# Altium PCB DAC_PCB_backup.PcbDoc
Units mil, origin at the board's own origin, x right, y up, seen from the top; angles counter-clockwise.
Board outline 1700 x 1900 mil, 4 copper layers (Top Layer, VDD, GND, Bottom Layer), stack 23.756 mil thick; 26 components, 30 nets, 86 pads, 19 vias.
Unrouted connection lines stored in the file: 21.
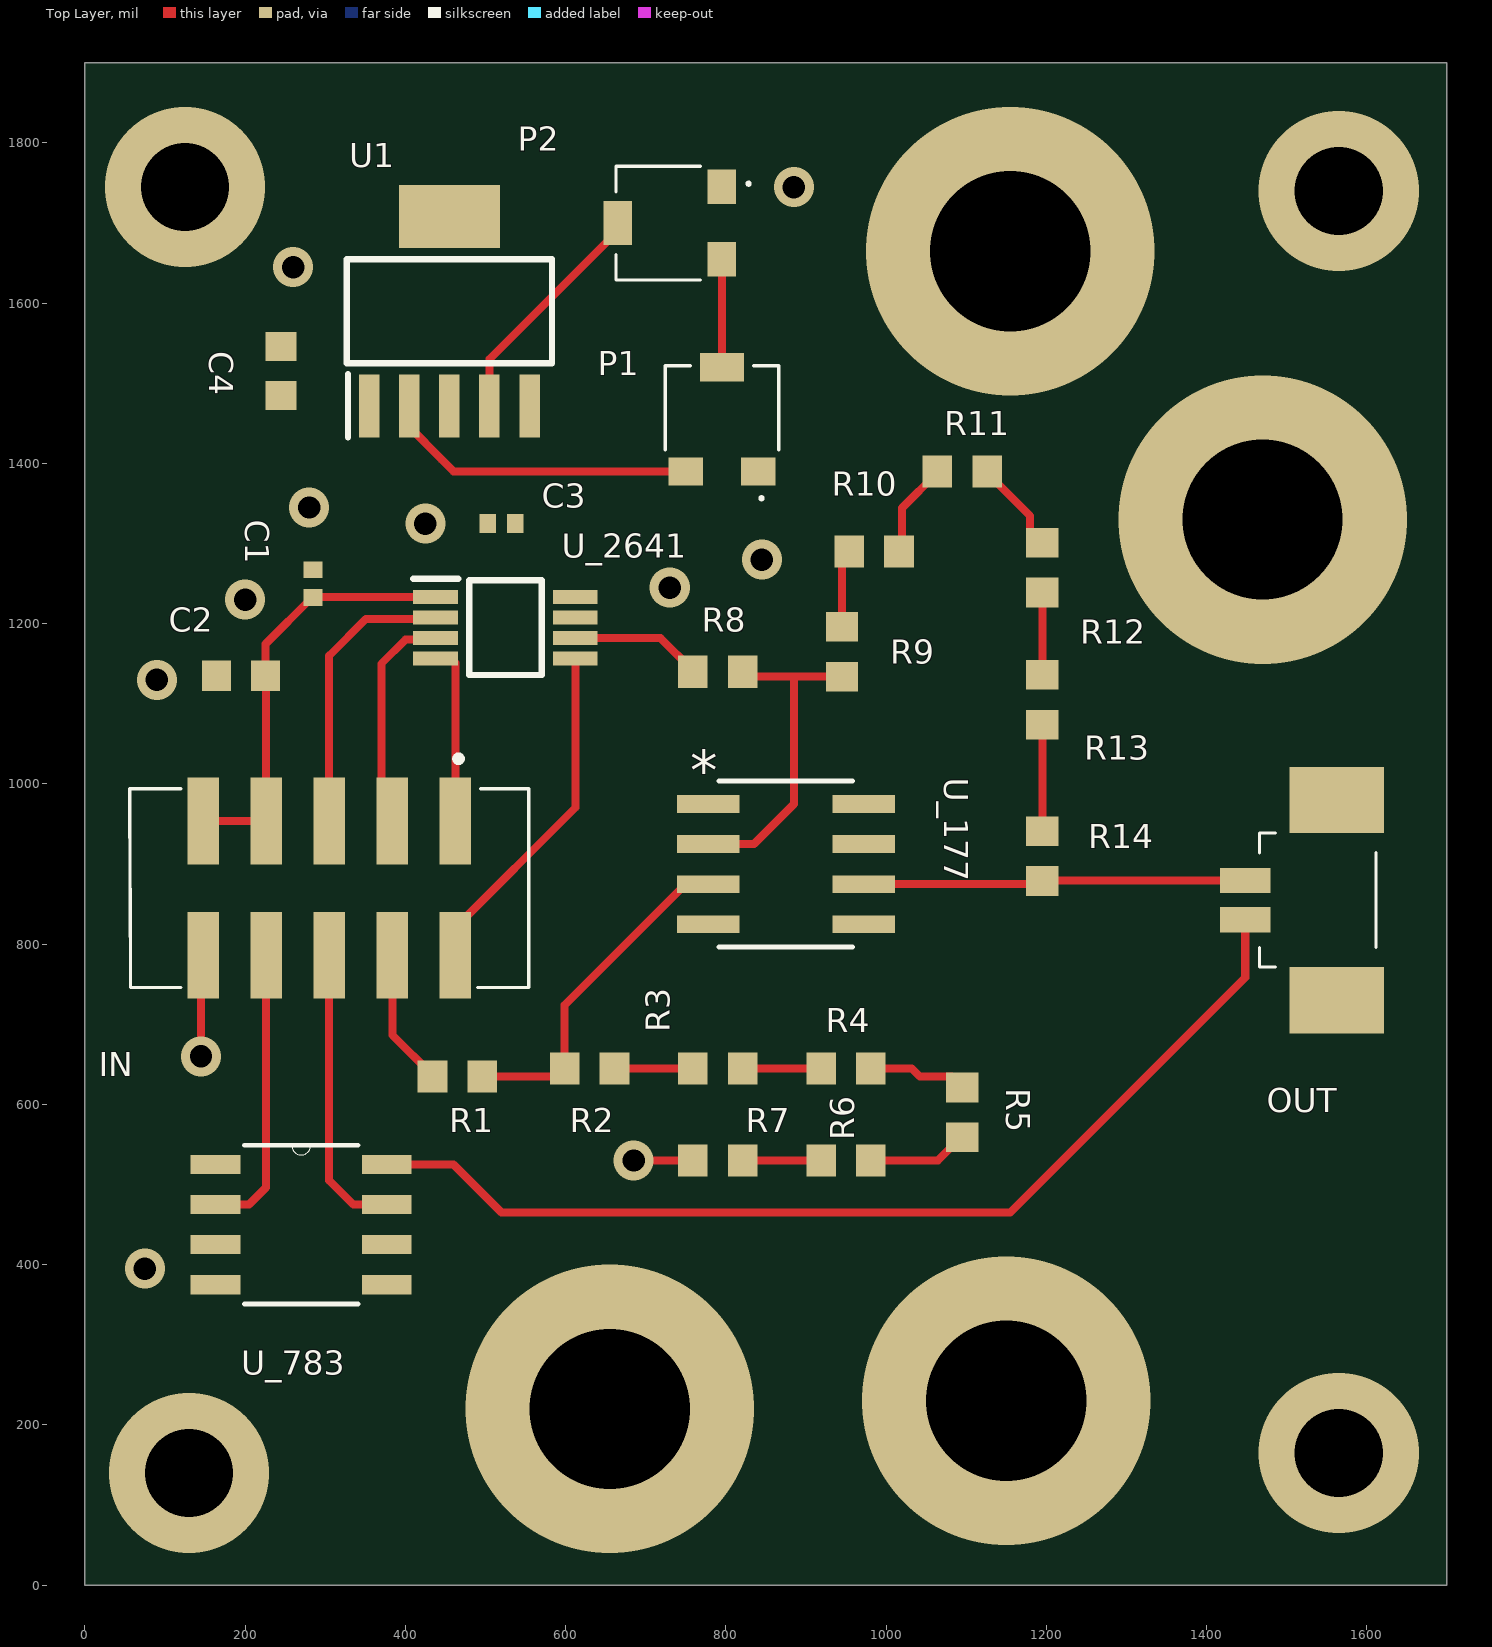
[diagram p0: Top Layer view]
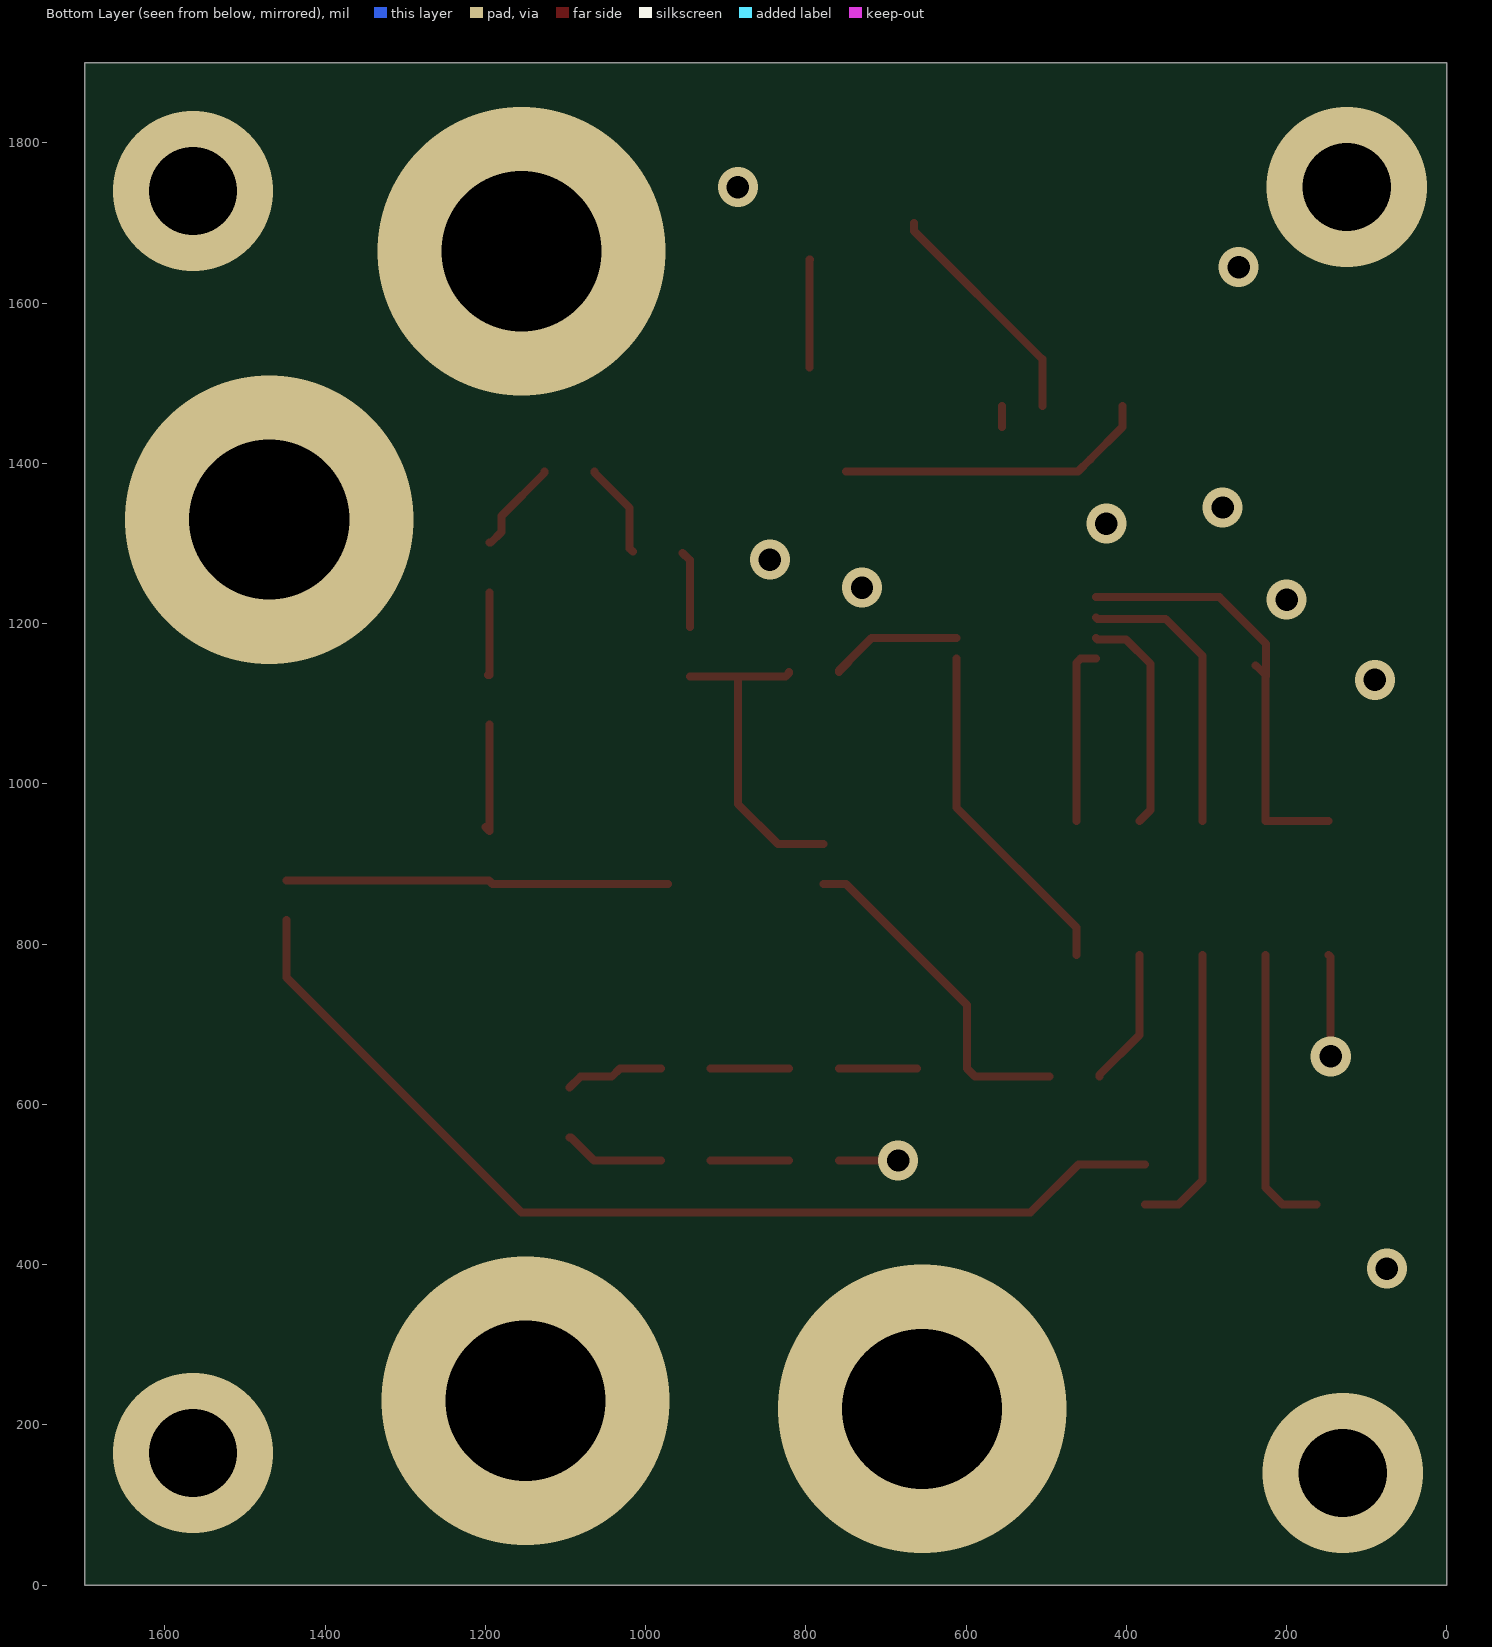
[diagram p1: Bottom Layer view, seen from below]
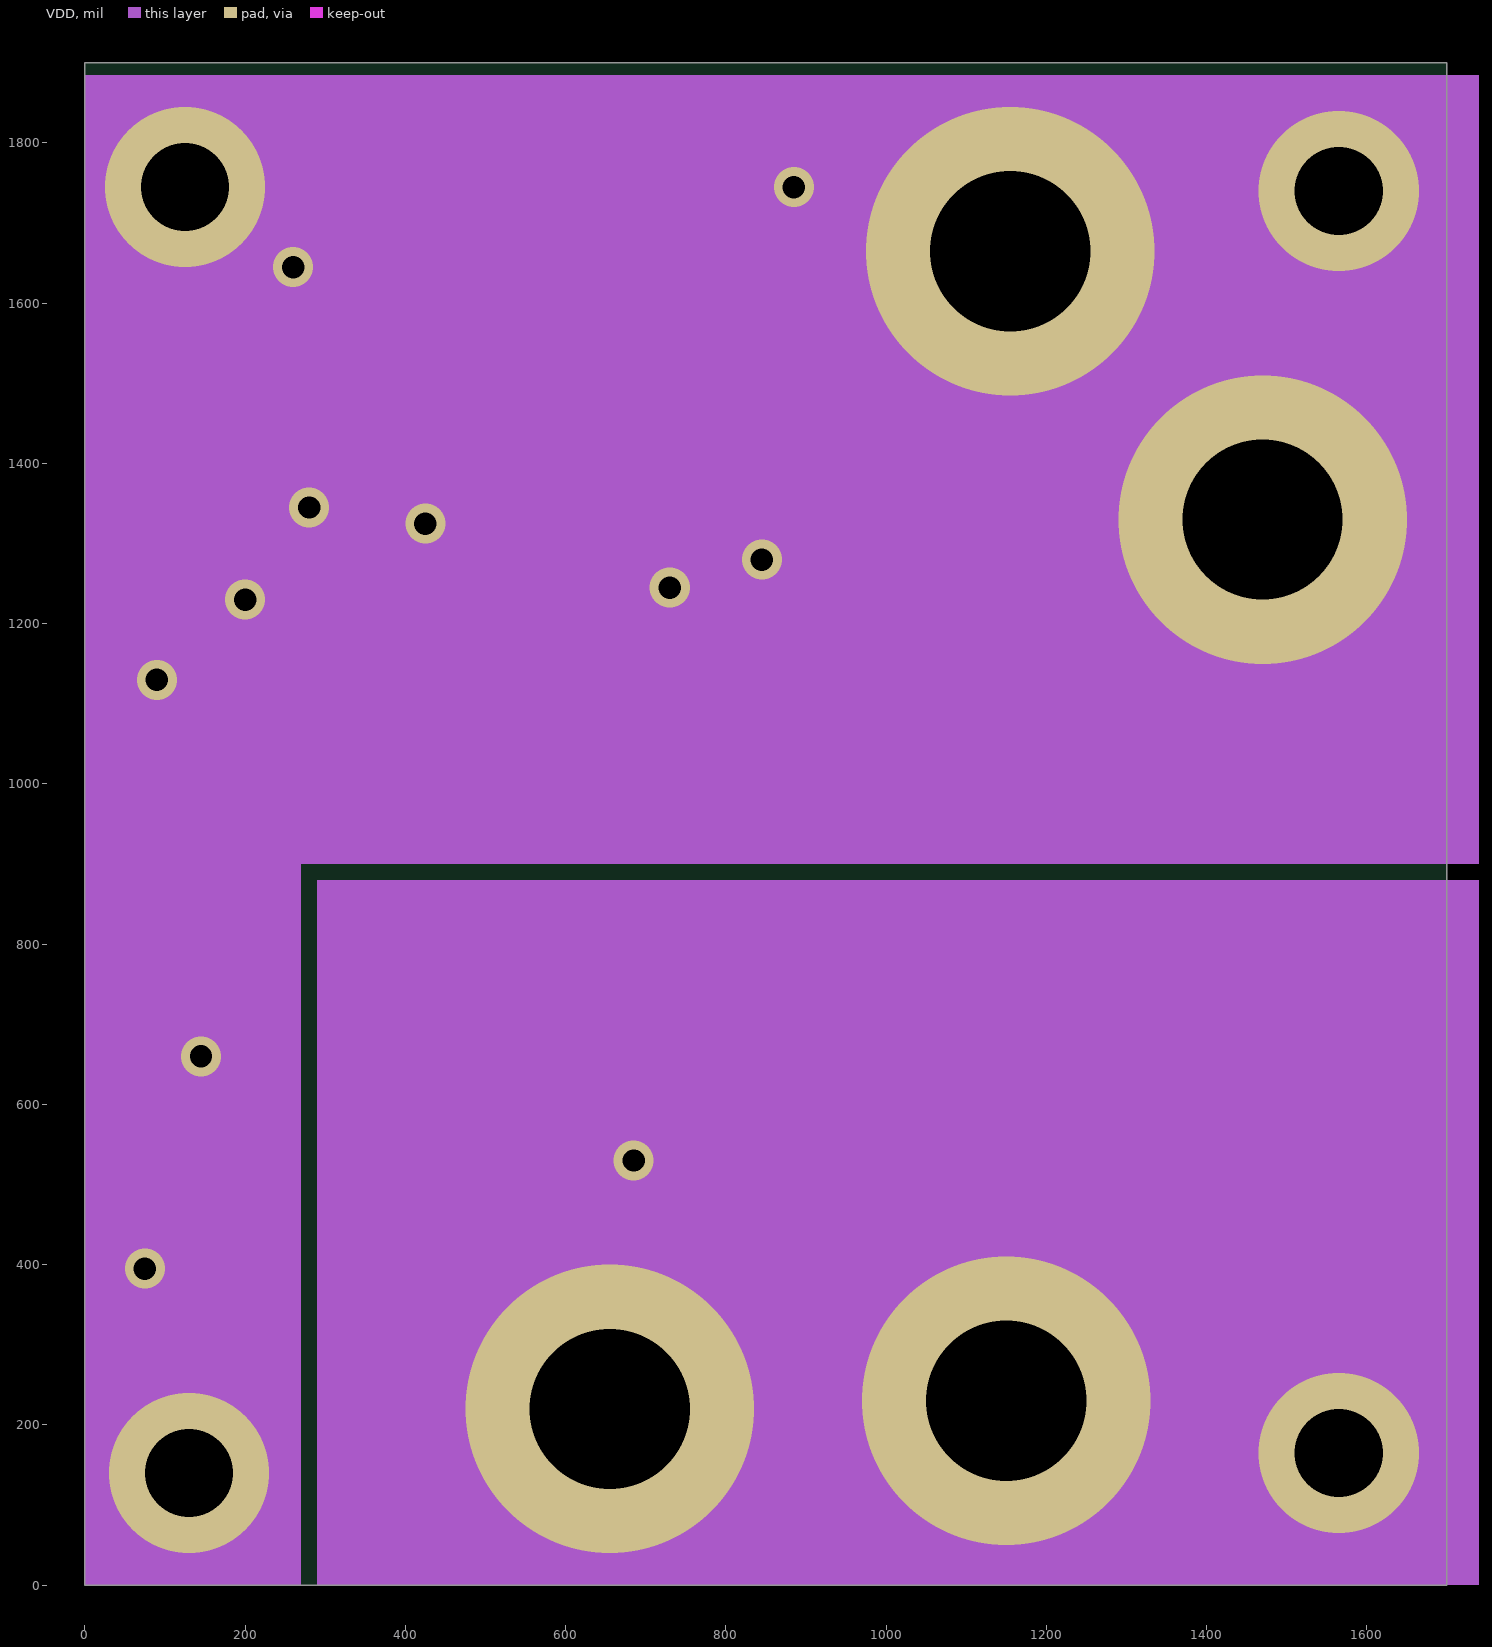
[diagram p2: VDD]
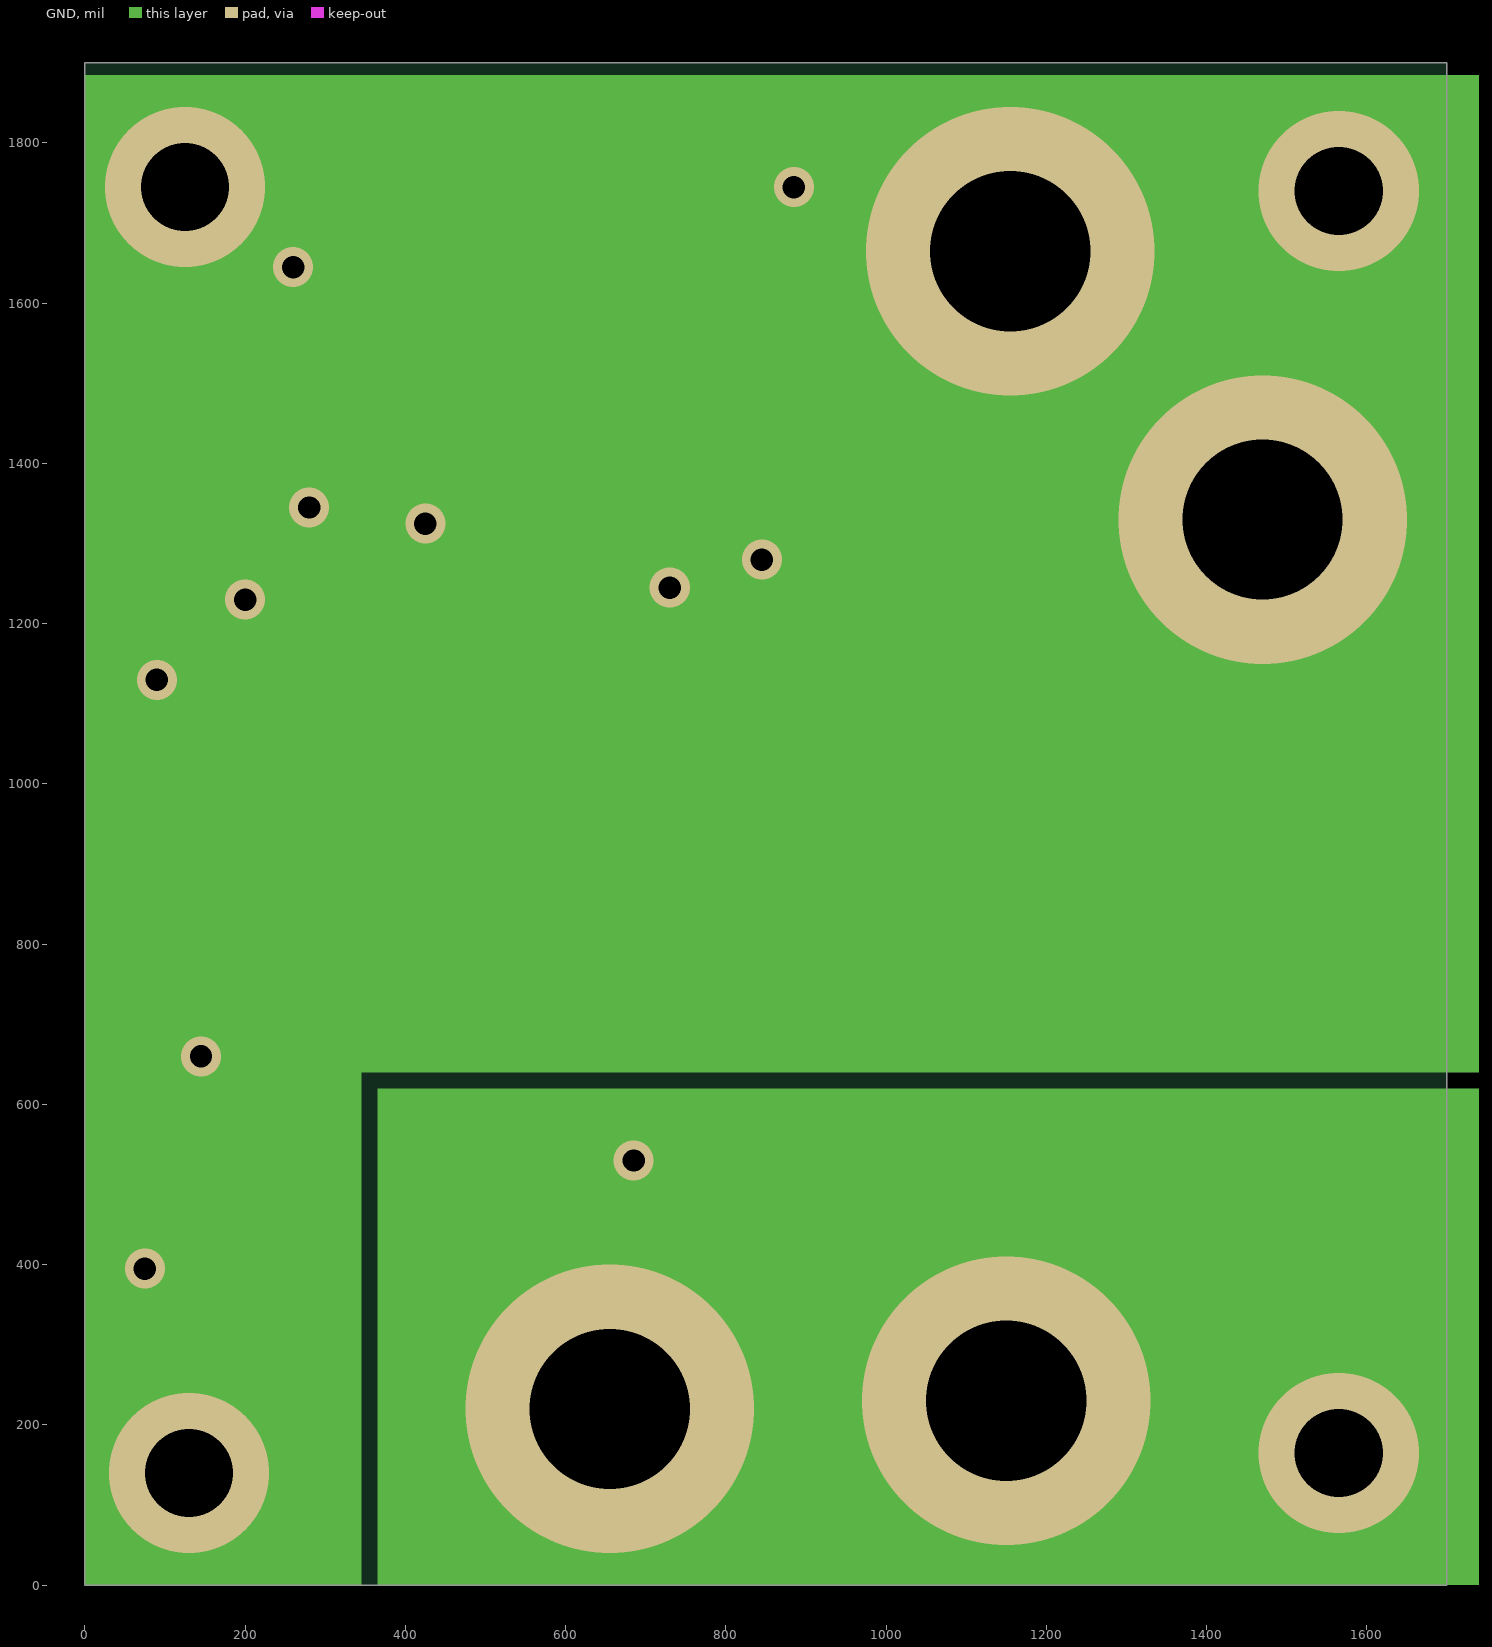
[diagram p3: GND]

## Layer stack, top to bottom
Top Solder: solder mask 0.4, Solder Resist, Dk 3.5
Top Layer: signal copper 1.4
Dielectric 1: prepreg 2.8, PP-006, Dk 4.1
VDD: signal copper 1.378
Dielectric 2: prepreg 12.6, FR-4, Dk 4.8
GND: signal copper 1.378
Dielectric 3: prepreg 2.8, PP-006, Dk 4.1
Bottom Layer: signal copper 1.4
Bottom Solder: solder mask 0.4, Solder Resist, Dk 3.5

## Board outline
0,0 1700,0 1700,1900 0,1900

## Design rules (kind name [scope] priority, off if disabled: settings)
Clearance [All] p1: gap=10 ignorepadtopadclearanceinfootprint=FALSE except(0: Arc-Hole Track-Hole SMDPad-Hole THPad-Hole Via-Hole Fill-Hole Poly-Hole Region-Hole Text-Hole)
PolygonConnect [All] p1: connectstyle=Relief reliefconductorwidth=10 reliefentries=4 polygonreliefangle="90 Angle" airgapwidth=10
RoutingVias [All] p1: holewidth=28 width=50 viastyle="Through Hole" minholewidth=28 minwidth=50 maxholewidth=28 maxwidth=50
SolderMaskExpansion [All] p1: expansion=4 istentingtop=FALSE
Width [All] p1: maxlimit=10 minlimit=10 preferedwidth=10
30 further rules are at their usual default settings.

## Classes and differential pairs
component class DAC_Connectors: IN OUT
component class DAC&DifferenceAmp: C1 C2 C3 C4 P1 P2 R1 R2 R3 R4 R5 R6 R7 R8 R9 R10 R11 R12 R13 R14 U1 U_177 U_783 U_2641

## Components (designator, comment, footprint, x,y, rotation, side; value= is the part's Value field where it differs from the comment)
C1 "C1005X5R1C104K050BA" CAPC1005X55N 285,1250 r90 top
C2 "0603YD105KAT2A" CAPC1608X90N 195,1135 r180 top
C3 "C1005X5R1C104K050BA" CAPC1005X55N 520,1325 r0 top
C4 "0603YD105KAT2A" CAPC1608X90N 245,1515.51 r90 top
IN "151118-1010" 1511181010 305,870 r180 top
OUT "10114828-10102LF" 1011482810102LF 1530,855 r90 top
P1 "PVG3A104C01R00" PVG3A104C01R00 795.28,1454.96 r0 top
P2 "PVG3A104C01R00" PVG3A104C01R00 730,1700 r90 top
R1 "RG1608N-102-W-T1" RESC1608X50N 465,635 r0 top
R2 "RG1608N-513-W-T1" RESC1608X50N 630,645 r0 top
R3 "RG1608N-513-W-T1" RESC1608X50N 790,645 r0 top
R4 "RG1608N-513-W-T1" RESC1608X50N 950,645 r0 top
R5 "RG1608N-513-W-T1" RESC1608X50N 1095,590 r270 top
R6 "RG1608N-513-W-T1" RESC1608X50N 950,530 r180 top
R7 "RG1608N-102-W-T1" RESC1608X50N 790,530 r0 top
R8 "RG1608N-102-W-T1" RESC1608X50N 790,1140 r0 top
R9 "RG1608N-513-W-T1" RESC1608X50N 945,1165 r90 top
R10 "RG1608N-513-W-T1" RESC1608X50N 985,1290 r0 top
R11 "RG1608N-513-W-T1" RESC1608X50N 1095,1390 r0 top
R12 "RG1608N-513-W-T1" RESC1608X50N 1195,1270 r270 top
R13 "RG1608N-513-W-T1" RESC1608X50N 1195,1105 r270 top
R14 "RG1608N-102-W-T1" RESC1608X50N 1195,910 r270 top
U1 "TPS73225DCQR" SOT127P706X180-6N 455,1590 r90 top
U_177 "OP177GSZ" R_8_ADI 875,900 r0 top
U_783 "AD783JRZ" SOIC127P600X272-8N 270,450 r0 top
U_2641 "LTC2641CMS8-16#PBF" SOP65P490X110-8N 525,1195 r0 top

## Footprints (in the part's own frame and the unit in brackets; to place one, negate y for a bottom-side part, rotate by r counter-clockwise, add the part's x,y. Pads: shape width x height; smd on the part's side, far side on the other; paste and mask are expansions set on the pad)
1511181010 [mm]
  rect 1x2.75 smd: 1(-4,-2.125) 2(-4,2.125) 3(-2,-2.125) 4(-2,2.125) 5(0,-2.125) 6(0,2.125) 7(2,-2.125) 8(2,2.125) 9(4,-2.125) 10(4,2.125)
  silkscreen extent -6.32,-4.2 6.32,3.15, body extent -6.32,-3.4 6.32,3.4, height 9.35
1011482810102LF [mm]
  rect 0.8x1.6 smd: 1(-0.625,2.075) 2(0.625,2.075)
  rect 2.1x3 smd: 3(-3.175,-0.825) 4(3.175,-0.825)
  silkscreen extent -2.12,-2.07 2.12,1.63, body extent -4.02,-2.11 4.02,2.8, height 4.8
CAPC1005X55N [mm]
  rect 0.53x0.6 smd: 1(-0.437,0) 2(0.437,0)
CAPC1608X90N [mm]
  rect 0.92x0.98 smd: 1(-0.775,0) 2(0.775,0)
PVG3A104C01R00 [mm]
  rect 1.1x0.9 smd: 1(1.15,-1.65) 3(-1.15,-1.65)
  rect 1.4x0.9 smd: 2(0,1.65)
  silkscreen extent -1.8,-2.55 1.8,1.7, body extent -1.8,-2.01 1.8,2.01, height 2.1
R_8_ADI [mil]
  rect 78x22 smd paste+0 mask+0: 1(-97,75) 2(-97,25) 3(-97,-25) 4(-97,-75) 5(97,-75) 6(97,-25) 7(97,25) 8(97,75)
  silkscreen extent -84,-104 84,104, body extent -129,-143 129,143, height 71
RESC1608X50N [mm]
  rect 0.94x1.02 smd: 1(-0.79,0) 2(0.79,0)
SOIC127P600X272-8N [mil]
  rect 62x24 smd: 1(-107,75) 2(-107,25) 3(-107,-25) 4(-107,-75) 5(107,-75) 6(107,-25) 7(107,25) 8(107,75)
  silkscreen extent -71,-99 71,99, body extent -96,-118 96,118, height 30
SOP65P490X110-8N [mm]
  rect 1.425x0.45 smd: 1(-2.212,0.975) 2(-2.212,0.325) 3(-2.212,-0.325) 4(-2.212,-0.975) 5(2.212,-0.975) 6(2.212,-0.325) 7(2.212,0.325) 8(2.212,0.975)
  silkscreen extent -2.93,-1.5 1.15,1.55, body extent -2.45,-1.5 2.45,1.5, height 1.1
SOT127P706X180-6N [mm]
  rect 2x0.65 smd: 1(-3,2.54) 2(-3,1.27) 3(-3,0) 4(-3,-1.27) 5(-3,-2.54)
  rect 2x3.2 smd: 6(3,0)
  silkscreen extent -4,-3.25 1.65,3.25, body extent -3.53,-3.25 3.53,3.25, height 1.8

## Part data
C1 C3: "CERAMIC CAPACITOR, 0.1UF, 16V, X5R, 10%, 0402", Package=None, Availability=Unavailable, MP=C1005X5R1C104K050BA, Price=None
C2 C4: "1ÂµF Â±10% 16V Ceramic Capacitor X5R 0603 (1608 Metric)", Package="1608 AVX", Availability=Unavailable, DigiKey-Purchase-URL=https://snapeda.com/shop?store=DigiKey&id=270397, MF=AVX, MP=0603YD105KAT2A, Price=None, SnapEDA_Link=https://www.snapeda.com/parts/0603YD105KAT2A/AVX%20/%20Kyocera/view-part/270397/?ref=snap
IN: "Connector", Manufacturer_Name=Molex, Datasheet Link=https://www.molex.com/pdm_docs/sd/1511181010_sd.pdf, Height=9.25mm, Manufacturer_Part_Number=151118-1010
OUT: "Connector", Manufacturer_Name=Amphenol, Mouser2 Part Number=649-10114828-10102, Datasheet Link=https://componentsearchengine.com//10114828-10102LF.pdf, Height=4.7mm, Manufacturer_Part_Number=10114828-10102LF, Mouser2 Price/Stock=https://www.mouser.com/Search/Refine.aspx?Keyword=649-10114828-10102
P1 P2: "Variable Resistor", Manufacturer_Name=Bourns, Mouser2 Part Number=81-PVG3A104C01R00, Datasheet Link=https://componentsearchengine.com//PVG3A104C01R00.pdf, Height=2mm, Manufacturer_Part_Number=PVG3A104C01R00, Mouser2 Price/Stock=https://www.mouser.com/Search/Refine.aspx?Keyword=81-PVG3A104C01R00
R1 R7 R8 R14: "RES SMD 1K OHM 0.05% 1/10W 0603", Package=None, Availability=Unavailable, MP=RG1608N-102-W-T1, Price=None
R2 R3 R4 R5 R6 R9 R10 R11 R12 R13: Package=None, Availability=Unavailable, MP=RG1608N-513-W-T1, Price=None
U1: "Integrated Circuit", Manufacturer_Name="Texas Instruments", Datasheet Link=http://www.ti.com/lit/gpn/tps732, Height=1.8mm, Manufacturer_Part_Number=TPS73225DCQR
U_177: "No Description Available", Built_By=EMA_UL_Team, Copyright="Copyright (C) 2021 Accelerated Designs. All rights reserved", Manufacturer_Part_Number=OP177GSZ, RefDes=RefDes, SourceLibrary=Analog_2012-01-01_9, Type=DEV, Vendor="Analog Devices Inc"
U_783: "Sample and Hold Amplifier 1 Circuit 8-SOIC", Package="SOIC-8 Analog Devices", Availability=Bad, Check_prices=https://www.snapeda.com/parts/AD783JRZ/Analog%20Devices%20Inc./view-part/353069/?ref=eda, MF="Analog Devices", MP=AD783JRZ, Price=None, Purchase-URL=https://pricing.snapeda.com/search/part/AD783JRZ/?ref=eda, SnapEDA_Link=https://www.snapeda.com/parts/AD783JRZ/Analog%20Devices%20Inc./view-part/353069/?ref=snap
U_2641: "Integrated Circuit", Manufacturer_Name="Analog Devices", Mouser Part Number=584-C2641CMS8-16PBF, Arrow Part Number=LTC2641CMS8-16#PBF, Arrow Price/Stock=https://www.arrow.com/en/products/ltc2641cms8-16pbf/analog-devices, Datasheet Link=https://www.analog.com/media/en/technical-documentation/data-sheets/26412fd.pdf, Height=1.1mm, Manufacturer_Part_Number=LTC2641CMS8-16#PBF, Mouser Price/Stock=https://www.mouser.com/Search/Refine.aspx?Keyword=584-C2641CMS8-16PBF

## Via types
v1: diameter 50, hole 28, Top Layer to Bottom Layer, 11 vias
v2: diameter 200, hole 110, Top Layer to Bottom Layer, 4 vias
v3: diameter 360, hole 200, Top Layer to Bottom Layer, 4 vias

## Nets (pads, with @x,y where several pads share a name; then routed paths per layer and width w, separated by ;. In a path a pad name is that pad's centre, name@x,y a point inside that pad or via, vN(x,y) a via of type N, cw(c..) or ccw(c..) an arc to the next point about the centre after c; other vN are vias at no path point)
+VDD: C4.1 U1.1 U1.5 U_177.7 U_783.1 | length 26.6
  Top Layer w10: U1.5@555,1445.32 U1.5
  other v3: 1155,1665
-VDD: U_177.4 U_783.5
  other v3: 655,220
AGND: R7.1 | length 73.9
  Top Layer w10: v1(685,530) R7.1
  other v3: 1150,230
DAC_CLR: IN.2 U_2641.5 | length 432.2
  Top Layer w10: IN.2 462.48,820.79 612.09,970.39 U_2641.5
DACCS: IN.5 U_2641.2 | length 359
  Top Layer w10: IN.5 305,1160 351.06,1206.06 436.18,1206.06 U_2641.2
DACSCLK: IN.3 U_2641.3 | length 283.3
  Top Layer w10: IN.3 370,967.4 370,1150 400.47,1180.47 436.18,1180.47 U_2641.3
DACVDD: C3.2 P1.3 U1.2 U_2641.7 | length 394.7
  Top Layer w10: U1.2 405,1445.32 445.16,1405.16 ; 445,1405 445.16,1405.16 ; P1.3 460.31,1390 445.16,1405.16
DGND: C1.2 C2.2 C3.1 C4.2 IN.10 OUT.3 OUT.4 P1.1 P2.1 U1.3 U1.6 U_783.3 U_2641.8 | length 127.4
  Top Layer w10: v1(145,660) 145,783.82 IN.10
  other v1: 75,395 90,1130 200,1230 730,1245 845,1280 425,1325 280,1345 260,1645 885,1745
  other v3: 1470,1330
NetC1_1: C1.1 C2.1 IN.7 IN.9 U_2641.1 | length 555.4
  Top Layer w10: IN.9 IN.7 C2.1@226.26,1135 ; C2.1@238.62,1148.11 C2.1 225.51,1174.68 283.92,1233.09 U_2641.1@412.62,1233.09 ; U_2641.1@412.91,1233.39 U_2641.1@412.62,1233.09 ; U_2641.1 437.62,1233.09 U_2641.1@412.62,1233.09
NetIN_1: IN.1 U_2641.4 | length 224.4
  Top Layer w10: U_2641.4 457.11,1156.61 462.48,1151.24 IN.1
NetIN_4: IN.4 R1.1 | length 172.1
  Top Layer w10: IN.4 383.74,686.73 433.9,636.57 R1.1
NetIN_8: IN.8 U_783.2 | length 362.1
  Top Layer w10: U_783.2 205,475 226.26,496.26 IN.8
NetOUT_1: OUT.1 U_783.8 | length 1289.7
  Top Layer w10: U_783.8 460,525 520,465 1155,465 1448.31,758.31 OUT.1
NetOUT_2: OUT.2 R14.2 U_177.6 | length 478.2
  Top Layer w10: U_177.6 1191.1,875 R14.2 1195.71,879.61 OUT.2
NetP1_2: P1.2 P2.3 | length 134.9
  Top Layer w10: P2.3 795.28,1654.41 P1.2
NetP2_2: P2.2 U1.4 | length 294.4
  Top Layer w10: U1.4 505,1530.12 665.04,1690.16 P2.2
NetR1_2: R1.2 R2.1 U_177.3 | length 427.5
  Top Layer w10: R1.2 588.9,635 R2.1 598.9,723.9 750,875 U_177.3
NetR2_2: R2.2 R3.1 | length 97.8
  Top Layer w10: R2.2 R3.1
NetR3_2: R3.2 R4.1 | length 97.8
  Top Layer w10: R3.2 R4.1
NetR4_2: R4.2 R5.1 | length 123.8
  Top Layer w10: R4.2 1032.07,645 1042.46,634.61 1081.5,634.61 R5.1
NetR5_2: R5.2 R6.1 | length 125.9
  Top Layer w10: R6.1 1064.53,530 1093.43,558.9 R5.2
NetR6_2: R6.2 R7.2 | length 97.8
  Top Layer w10: R7.2 R6.2
NetR8_1: R8.1 U_2641.6 | length 182.5
  Top Layer w10: U_2641.6 718.27,1182.2 758.9,1141.57 R8.1 R8.1@746.69,1152.2
NetR8_2: R8.2 R9.1 U_177.2 | length 414
  Top Layer w10: U_177.2 835,925 885,975 885,1133.9 ; R8.2 821.1,1138.43 825.63,1133.9 885,1133.9 ; R9.1 885,1133.9
NetR9_2: R9.2 R10.1 | length 96
  Top Layer w10: R9.2 945,1279.53 R10.1@953.9,1288.43
NetR10_2: R10.2 R11.1 | length 119.8
  Top Layer w10: R10.2 1020,1293.9 1020,1344.53 1063.9,1388.43 R11.1
NetR11_2: R11.2 R12.1 | length 118.4
  Top Layer w10: R11.2 1126.1,1388.43 1179.92,1334.61 1179.92,1314.61 1193.43,1301.1 R12.1
NetR12_2: R12.2 R13.1 | length 104.4
  Top Layer w10: R12.2 R13.1 R13.1@1196.57,1136.1
NetR13_2: R13.2 R14.1 | length 139.9
  Top Layer w10: R13.2 R14.1 R14.1@1200,946.1
"S&H Control": IN.6 U_783.7 | length 365.8
  Top Layer w10: IN.6 305,505 335,475 U_783.7
pads on no net: U_177.1 U_177.5 U_177.8 U_783.4 U_783.6
copper on no net:
  other v2: 130,140 1565,165 1565,1740 125,1745

## Other copper
VDD:
  rectangle net +VDD: 0,0 270,970
  rectangle net +VDD: 0,900 1740,1885
  rectangle net -VDD: 290,0 1740,880
GND:
  rectangle net DGND: 0,0 345,745
  rectangle net DGND: 0,640 1740,1885
  rectangle net AGND: 365,0 1740,620

## Text inside footprints (layer, text, board x,y; h text height)
U_177: Top Overlay "*" at 755.5,992 h50; Mechanical 7 "Default Padstyle: RX78Y22D0T" at 525,601.5 h50; Mechanical 7 "Pin One Padstyle: RX78Y22D0T" at 525,541.5 h50; Mechanical 7 "Alt 1 Padstyle: OX60Y90D30P" at 537.5,361.5 h50; Mechanical 7 "Alt 2 Padstyle: OX90Y60D30P" at 537.5,301.5 h50; Mechanical 7 "0.157in/3.988mm" at 781.25,1093.5 h25; Mechanical 7 "0.244in/6.198mm" at 781.25,1168.5 h25; Mechanical 7 "0.197in/5.004mm" at 1073.5,887.5 h25; Mechanical 7 "0.05in/1.27mm" at 495.5,937.5 h25; Mechanical 7 "0.05in/1.27mm" at 696.75,681.5 h25; Mechanical 13 "*" at 799,945.5 h50